# Altium PCB 高考倒计时.PcbDoc
Units mil, origin at the board's own origin, x right, y up, seen from the top; angles counter-clockwise.
Board outline 3500 x 2635 mil, 2 copper layers (Top Layer, Bottom Layer); 80 components, 65 nets, 247 pads, 256 vias.
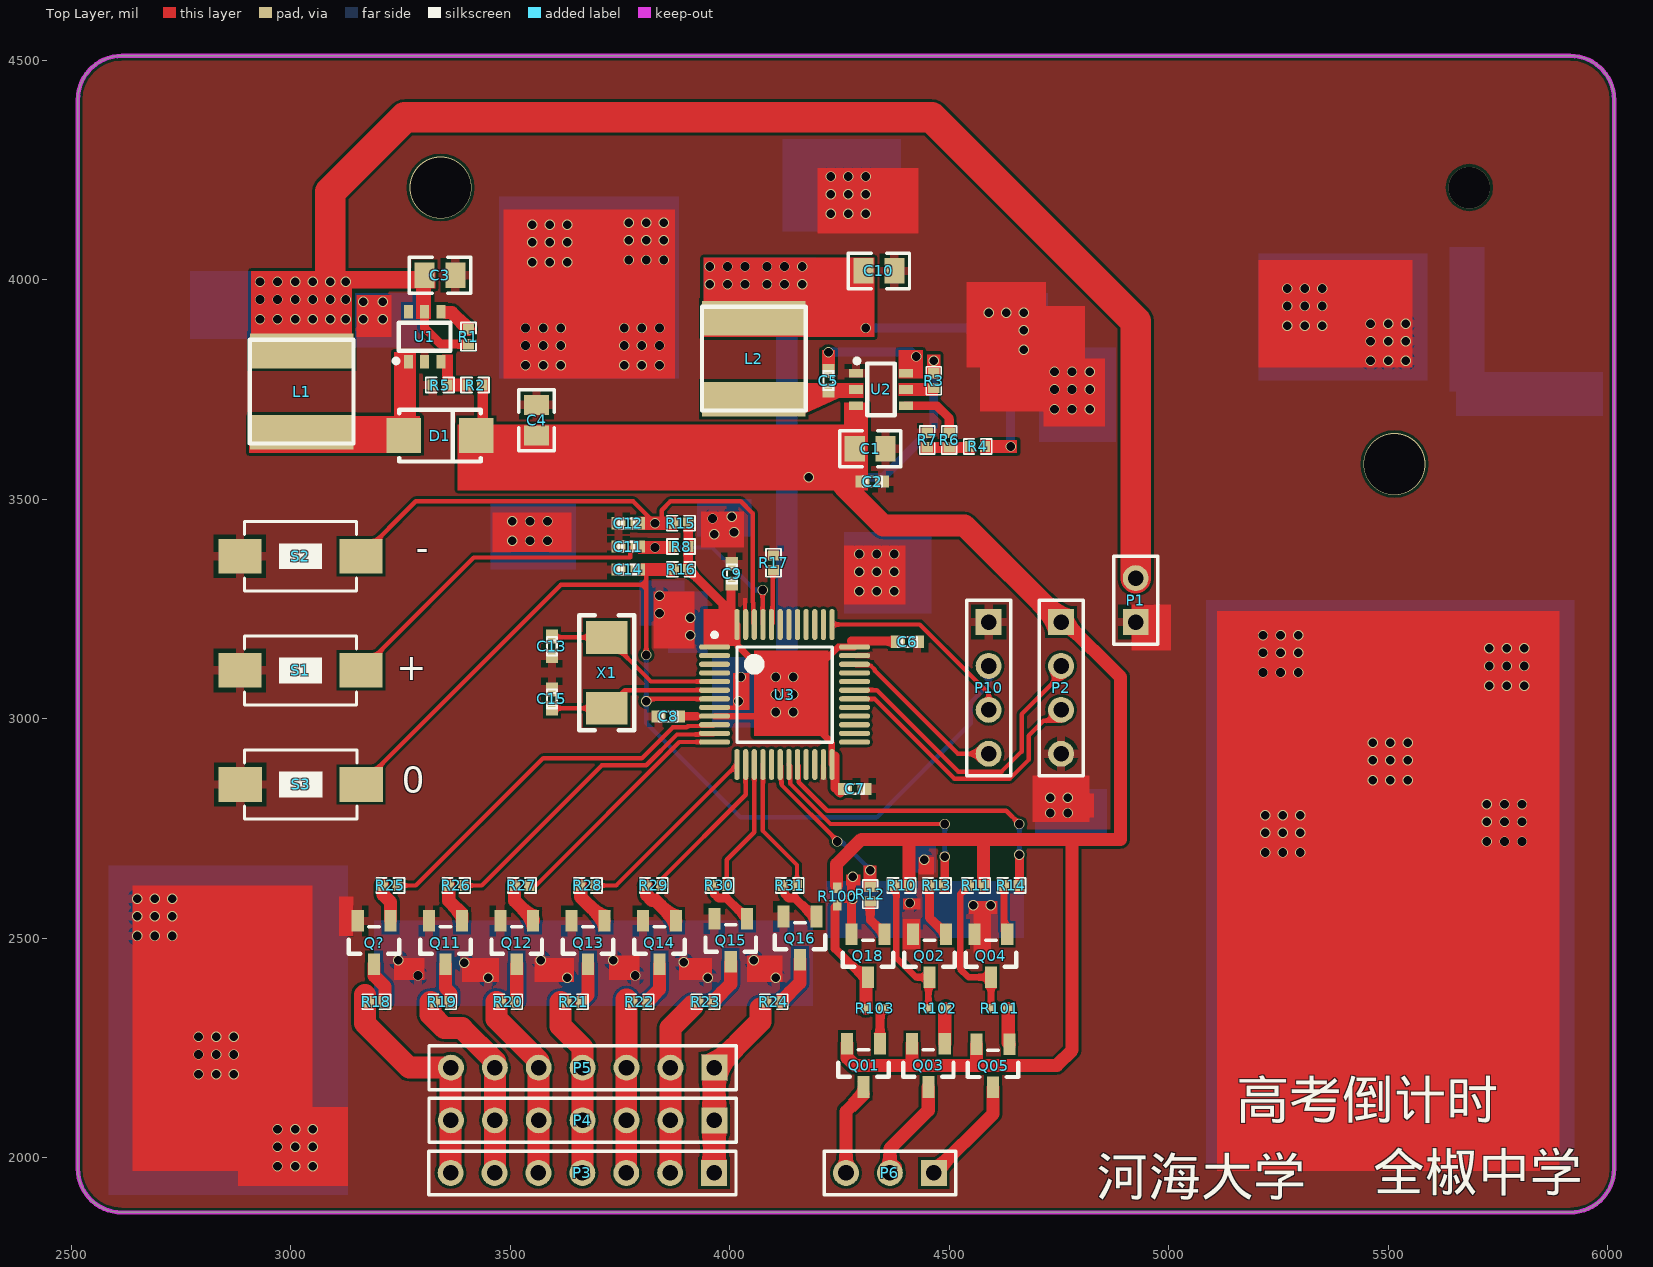
[diagram p0: Top Layer view]
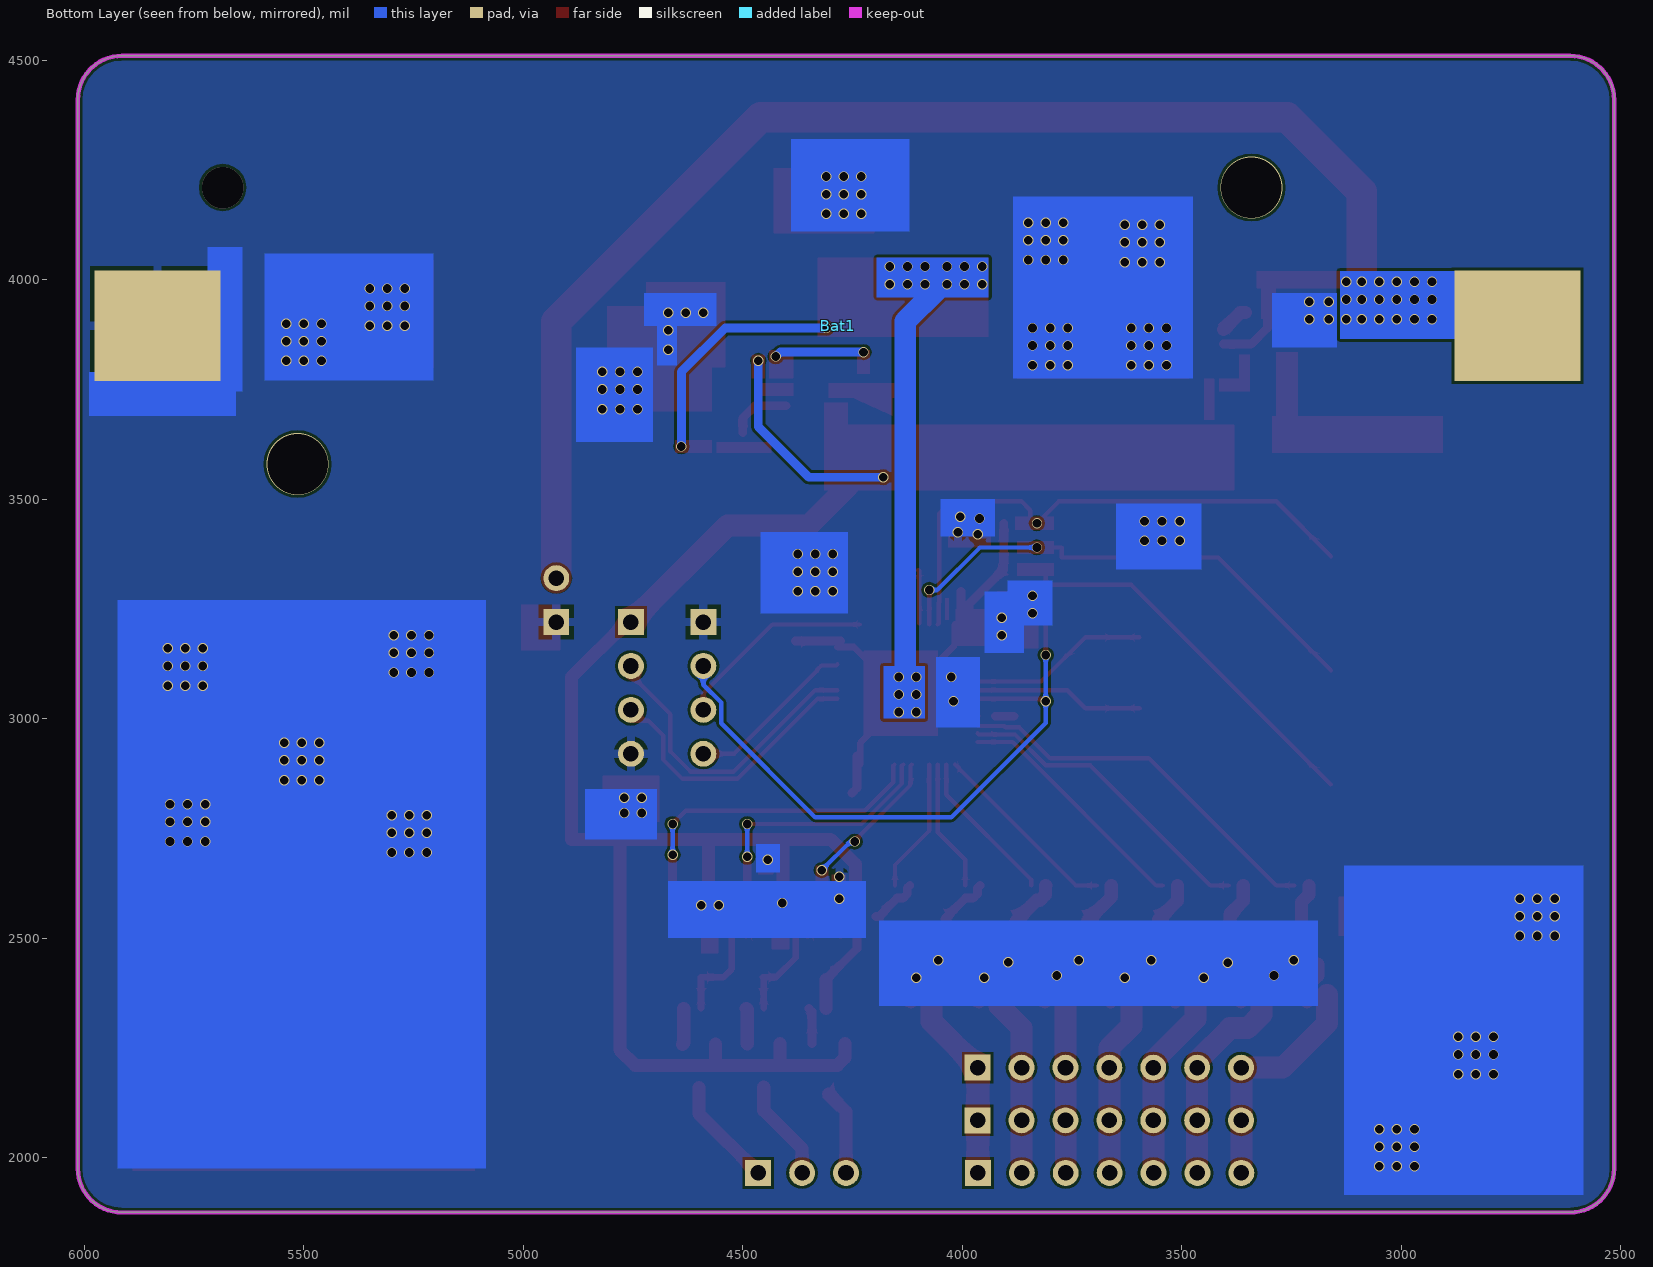
[diagram p1: Bottom Layer view, seen from below]

## Layer stack, top to bottom
Top Solder: solder mask 0.4, Solder Resist, Dk 3.5
Top Layer: signal copper 1.4
Dielectric 1: dielectric 12.6, FR-4, Dk 4.8
Bottom Layer: signal copper 1.4
Bottom Solder: solder mask 0.4, Solder Resist, Dk 3.5

## Board outline
2515,1975 ccw(c2615,1975) 2615,1875 5915,1875 ccw(c5915,1975) 6015,1975 6015,4410 ccw(c5915,4410) 5915,4510 2615,4510 ccw(c2615,4410) 2515,4410

## Design rules (kind name [scope] priority, off if disabled: settings)
Clearance [All] p1: gap=6
PolygonConnect [All] p1: connectstyle=Relief reliefconductorwidth=20 reliefentries=4 polygonreliefangle="90 Angle" airgapwidth=10
RoutingVias [All] p1: holewidth=28 width=50 viastyle="Through Hole" minholewidth=28 minwidth=50 maxholewidth=28 maxwidth=50
SolderMaskExpansion [All] p1: expansion=4
Width [All] p1: maxlimit=10000 minlimit=6 preferedwidth=10
30 further rules are at their usual default settings.

## Components (designator, comment, footprint, x,y, rotation, side; value= is the part's Value field where it differs from the comment)
Bat1 "18650" 18650 2735,3895 r0 bottom
C1 "22uF" 0805 4320,3615 r180 top
C2 "104" 0402-CAP 4325,3540 r0 top
C3 "22uF" 0805 3340,4010 r180 top
C4 "22uF" 0805 3560,3680 r270 top
C5 "104" 0402-CAP 4225,3770 r270 top
C6 "104" 0402-CAP 4405,3175 r0 top
C7 "104" 0402-CAP 4285,2840 r0 top
C8 "104" 0402-CAP 3860,3005 r180 top
C9 "104" 0402-CAP 4005,3330 r90 top
C10 "22uF" 0805 4340,4020 r180 top
C11 "104" 0402-CAP 3768.7,3392 r180 top
C12 "104" 0402-CAP 3768.7,3445 r180 top
C13 "22pf" 0402-CAP 3595,3165 r270 top
C14 "104" 0402-CAP 3768.7,3340 r180 top
C15 "22pf" 0402-CAP 3595,3045 r90 top
D1 "SS54" DIOM4225X24N 3335,3640 r180 top
L1 "6.8uH" L-SMD-6.0X6.0X4.7 3025,3745 r270 top
L2 "6.8uH" L-SMD-6.0X6.0X4.7 4055,3820 r90 top
P1 "充电输入" HDR1X2 4925,3220 r90 top
P2 "Header 4" HDR1X4 4755,3220 r270 top
P3 "Header 7" HDR1X7 3964.41,1965 r180 top
P4 "Header 7" HDR1X7 3965,2085 r180 top
P5 "Header 7" HDR1X7 3965,2205 r180 top
P6 "Header 3" HDR1X3 4465,1965 r180 top
P10 "Header 4" HDR1X4 4590,3220 r270 top
Q01 "S8550" SOT-23(SOT-23-3) 4305,2210 r180 top
Q02 "S8050" SOT-23(SOT-23-3) 4455,2460 r180 top
Q03 "S8550" SOT-23(SOT-23-3) 4452.5,2210 r180 top
Q04 "S8050" SOT-23(SOT-23-3) 4595,2460 r180 top
Q05 "S8550" SOT-23(SOT-23-3) 4600,2209.2 r180 top
Q11 "S8050" SOT-23(SOT-23-3) 3352.5,2490 r180 top
Q12 "S8050" SOT-23(SOT-23-3) 3515,2490 r180 top
Q13 "S8050" SOT-23(SOT-23-3) 3677.5,2490 r180 top
Q14 "S8050" SOT-23(SOT-23-3) 3840,2490 r180 top
Q15 "S8050" SOT-23(SOT-23-3) 4002.5,2495 r180 top
Q16 "S8050" SOT-23(SOT-23-3) 4160,2500 r180 top
Q18 "S8050" SOT-23(SOT-23-3) 4315,2460 r180 top
Q? "S8050" SOT-23(SOT-23-3) 3190,2490 r180 top
R1 "10K" 0402#1 3405,3870 r270 top
R2 "38.3K" 0402#1 3420,3760 r0 top
R3 "100K" 0402#1 4465,3770 r90 top
R4 "40.2K" 0402#1 4565,3620 r180 top
R5 "1.5K" 0402#1 3340,3760 r0 top
R6 "10K" 0402#1 4500,3635 r90 top
R7 "13K" 0402#1 4450,3635 r90 top
R8 "10K" 0402#1 3889.3,3392 r0 top
R10 "1K" 0402#1 4391.7,2620 r0 top
R11 "1K" 0402#1 4561.7,2620 r0 top
R12 "1K" 0402#1 4320,2600 r270 top
R13 "1K" 0402#1 4471.7,2620 r180 top
R14 "1K" 0402#1 4641.7,2620 r180 top
R15 "10K" 0402#1 3888.7,3445 r180 top
R16 "10K" 0402#1 3889.3,3340 r0 top
R17 "10K" 0402#1 4100,3355 r270 top
R18 "490" 0402#1 3195,2355 r180 top
R19 "490" 0402#1 3345,2355 r180 top
R20 "490" 0402#1 3495,2355 r180 top
R21 "490" 0402#1 3645,2355 r180 top
R22 "490" 0402#1 3795,2355 r180 top
R23 "490" 0402#1 3945,2355 r180 top
R24 "490" 0402#1 4100,2355 r180 top
R25 "1K" 0402#1 3226.7,2620 r180 top
R26 "1K" 0402#1 3376.7,2620 r180 top
R27 "1K" 0402#1 3526.7,2620 r180 top
R28 "1K" 0402#1 3676.7,2620 r180 top
R29 "1K" 0402#1 3826.7,2620 r180 top
R30 "1K" 0402#1 3976.7,2620 r180 top
R31 "1K" 0402#1 4136.7,2620 r180 top
R100 "1K" 0402#2 4245,2595 r90 top
R101 "1K" 0402#2 4615,2340 r0 top
R102 "1K" 0402#2 4472.5,2340 r180 top
R103 "1K" 0402#2 4330,2340 r180 top
S1 "Switch" Switch_Liu 3020,3110 r0 top
S2 "Switch" Switch_Liu 3020,3370 r0 top
S3 "Switch" Switch_Liu 3025,2850 r180 top
U1 "SX1308" SOT-23-6 3305,3870 r0 top
U2 "BL8032CB6TR" SOT-23-6 4345,3750 r270 top
U3 "STM32F103C8T6" STM-LQFP48_N 4125,3055 r0 top
X1 "X503212MSD2GC" OSC-YSX-5032_2P 3720,3104.41 r0 top

## Footprints (in the part's own frame and the unit in brackets; to place one, negate y for a bottom-side part, rotate by r counter-clockwise, add the part's x,y. Pads: shape width x height; smd on the part's side, far side on the other; paste and mask are expansions set on the pad)
0402#1 [mm]
  rect 0.6x0.65 smd: 1(-0.424,0) 2(0.424,0)
  silkscreen extent -0.82,-0.43 0.81,0.43
0402#2 [mm] "Chip Capacitor, Body 1.0x0.5mm, IPC High Density"
  rect 0.6x0.5 smd: 1(-0.5,0) 2(0.5,0)
  body extent -0.55,-0.3 0.55,0.3, height 1.3
0402-CAP [mil]
  rect 32x27.9 smd: 1(21.9,0) 2(-21.9,0)
  silkscreen extent -21,-11 21,11
0805 [mm]
  rect 1.16x1.47 smd: 1(-0.89,0) 2(0.89,0)
  silkscreen extent -1.77,-1.04 1.77,1.03, body extent -1,-0.62 1,0.63, height 0.49
18650 [mm]
  rect 7.3x6.4 smd: 1(0,0) 2(78.7,0)
DIOM4225X24N [mm] "Molded Diode, 2-Leads, Body 4.25x2.49mm, IPC Medium Density"
  rect 2x2 smd: 1(1.973,-0.127) 2(-2.227,-0.127)
  silkscreen extent -2.48,-1.63 2.22,1.37
HDR1X2 [mm] "Connector; Header; 2 Position"
  rect 1.5x1.5 hole 0.9: 1(0,0)
  round 1.5 hole 0.9: 2(2.54,0)
  silkscreen extent -1.27,-1.27 3.81,1.27
HDR1X3 [mm] "Connector; Header; 3 Position"
  rect 1.5x1.5 hole 0.9: 1(0,0)
  round 1.5 hole 0.9: 2(2.54,0) 3(5.08,0)
  silkscreen extent -1.27,-1.27 6.35,1.27
HDR1X4 [mm] "Connector; Header; 4 Position"
  rect 1.5x1.5 hole 0.9: 1(0,0)
  round 1.5 hole 0.9: 2(2.54,0) 3(5.08,0) 4(7.62,0)
  silkscreen extent -1.27,-1.27 8.89,1.27
HDR1X7 [mm] "Connector; Header; 7 Position"
  rect 1.5x1.5 hole 0.9: 1(0,0)
  round 1.5 hole 0.9: 2(2.54,0) 3(5.08,0) 4(7.62,0) 5(10.16,0) 6(12.7,0) 7(15.24,0)
  silkscreen extent -1.27,-1.27 16.51,1.27
L-SMD-6.0X6.0X4.7 [mm]
  rect 2x6 smd: 1(-2.35,0) 2(2.35,0)
  silkscreen extent -3,-3 3,3
OSC-YSX-5032_2P [mm]
  rect 2.4x1.9 smd: 1(0,2.05) 2(0,-2.05)
  silkscreen extent -1.6,-3.33 1.6,3.32
SOT-23(SOT-23-3) [mm]
  rect 0.7x1.25 smd: 1(-0.95,-1.25) 2(0.95,-1.25) 3(0,1.25)
  silkscreen extent -1.46,-0.9 1.46,0.65
SOT-23-6 [mil]
  rect 20.1x31.5 smd: 1(-37,-57) 2(0,-57) 3(37,-57) 4(37,57) 5(0,57) 6(-37,57)
  silkscreen extent -70,-60 59,31
STM-LQFP48_N [mm] "QFP, 48-Leads, Body 7x7mm, Pitch 0.5mm, IPC Medium Density"
  oval 1.8x0.3 smd: 1(-4.05,2.75) 2(-4.05,2.25) 3(-4.05,1.75) 4(-4.05,1.25) 5(-4.05,0.75) 6(-4.05,0.25) 7(-4.05,-0.25) 8(-4.05,-0.75) 9(-4.05,-1.25) 10(-4.05,-1.75) 11(-4.05,-2.25) 12(-4.05,-2.75) 25(4.05,-2.75) 26(4.05,-2.25) 27(4.05,-1.75) 28(4.05,-1.25) 29(4.05,-0.75) 30(4.05,-0.25) 31(4.05,0.25) 32(4.05,0.75) 33(4.05,1.25) 34(4.05,1.75) 35(4.05,2.25) 36(4.05,2.75)
  oval 0.3x1.8 smd: 13(-2.75,-4.05) 14(-2.25,-4.05) 15(-1.75,-4.05) 16(-1.25,-4.05) 17(-0.75,-4.05) 18(-0.25,-4.05) 19(0.25,-4.05) 20(0.75,-4.05) 21(1.25,-4.05) 22(1.75,-4.05) 23(2.25,-4.05) 24(2.75,-4.05) 37(2.75,4.05) 38(2.25,4.05) 39(1.75,4.05) 40(1.25,4.05) 41(0.75,4.05) 42(0.25,4.05) 43(-0.25,4.05) 44(-0.75,4.05) 45(-1.25,4.05) 46(-1.75,4.05) 47(-2.25,4.05) 48(-2.75,4.05)
  silkscreen extent -4.17,-2.75 2.75,3.57, body extent -3.5,-3.5 3.5,3.5, height 1.6
Switch_Liu [mm]
  rect 2.5x2 smd: 1(3.556,0) 2(-3.444,0)
  silkscreen extent -3.19,-2 3.31,2, body extent -3.17,-2.03 3.3,2.03, height 1.2

## Part data
C1 C3 C4 C10: library part 1uF
C2 C5 C6 C7 C8 C9 C11 C12 C13 C14 C15: library part 0.1UF-16V(+-10%)(0402)
P1: library part "Header 2", "Header, 2-Pin"
P2 P10: "Header, 4-Pin"
P3 P4 P5: "Header, 7-Pin"
P6: "Header, 3-Pin"
R1 R2 R3 R4 R5 R6 R7 R8 R15 R16 R17 R18 R19 R20 R21 R22 R23 R24: library part 1K
U3: "ARM Cortex-M3 32-bit MCU, 64 KB Flash, 20 KB Internal RAM, 37 I/Os, 48-pin LQFP, -40 to 85 degC, Tray"

## Via types
v1: diameter 23.62, hole 19.68, Top Layer to Bottom Layer, 253 vias
v2: diameter 141.73, hole 137.8, Top Layer to Bottom Layer, 2 vias
v3: diameter 94.49, hole 94.49, Top Layer to Bottom Layer, 1 vias

## Nets (pads, with @x,y where several pads share a name; then routed paths per layer and width w, separated by ;. In a path a pad name is that pad's centre, name@x,y a point inside that pad or via, vN(x,y) a via of type N, cw(c..) or ccw(c..) an arc to the next point about the centre after c; other vN are vias at no path point)
3V3: C6.2 C7.2 C8.2 C9.2 C10.2 L2.2 R4.1 R8.2 R15.1 R16.2 U3.1 U3.9 U3.24 U3.36 U3.48 | length 2827.2
  Top Layer w15: U3.9 4171.52,3005.79 ; U3.48 4017.01,3214.17 4017.01,3167.99 4075,3110 4175,3110 ; U3.24 4232.99,2895.83 4232.99,2944.32 4171.52,3005.79 ; U3.36 4247.16,3163.27 4193.9,3110 4175,3110 ; 4171.52,3005.79 4171.52,3106.52 4175,3110
  Top Layer w20: C8.2@3881.9,3005.53 3925,3005.53 ; R15.1 3905.4,3340.6 R16.2 3985,3261 3985,3235 ; 4003.1,3206.9 4003.1,3290 ; 4240,2915 4240,2841.9 C7.2@4251.9,2830 ; 4276.9,3176.9 C6.2@4380,3176.9
  Bottom Layer w20: v1(4310,3890) 4540,3890 4640,3790 v1(4640,3620)
  Bottom Layer w50: 4055,3980 4130,3905 4130,3095
  other v1: 4105,3015 4145,3015 4105,3055 4145,3055 4105,3095 4145,3095 3955,3990 3995,3990 4035,3990 4085,3990 4125,3990 4165,3990 3955,4030 3995,4030 4035,4030 4085,4030 4125,4030 4165,4030
16V: C1.2 C2.2 C4.2 D1.2 P2.1 Q01.2 Q03.2 Q05.2 R2.2 R3.2 R10.2 R11.2 R100.2 U2.3 | length 3737.8
  Top Layer w30: R100.2@4243.4,2620 4243.4,2668.4 4300,2725 4408.4,2725 ; Q01.2 4267.6,2227.4 4285,2210 4420,2210 ; R10.2 4408.4,2725 ; Q03.2 4415.1,2214.9 4420,2210 ; Q05.2 4562.6,2212.4 4565,2210 ; R11.2 4578.4,2725 ; P2.1 4765,3220 4890,3095 4890,2725 4780,2725 ; 4408.4,2725 4578.4,2725 ; 4420,2210 4565,2210 ; 4565,2210 4745,2210 4780,2245 4780,2725 ; 4578.4,2725 4780,2725
  Top Layer w50: 4260,3530 4350,3440 4535,3440 P2.1
  Bottom Layer w20: v1(4180,3550) 4350,3550 4465,3665 v1(4465,3815)
A0: R25.1 U3.10 | length 869.9
  Top Layer w10: R25.1 3285,2620 3575,2910 3800,2910 3870.05,2980.05 3902.46,2980.05 3904.8,2982.39 3904.97,2982.39 3905.54,2982.96 3906.86,2982.96 3907.22,2983.32 U3.10@3962.77,2983.32
A1: R26.1 U3.11 | length 715.6
  Top Layer w10: R26.1 3435,2620 3709,2894 3810,2894 3880,2964 3963.13,2964 U3.11
A2: R27.1 U3.12 | length 557.5
  Top Layer w10: R27.1 3558.63,2620 3885.36,2946.73 U3.12
A3: R28.1 U3.13 | length 437.5
  Top Layer w10: R28.1 3741.18,2620 U3.13
A4: R29.1 U3.14 | length 355.5
  Top Layer w10: R29.1 3843.4,2633.4 4036.42,2826.42 U3.14
A5: R30.1 U3.15 | length 301.5
  Top Layer w10: R30.1 3993.4,2678.4 4056.1,2741.1 U3.15
A6: R31.1 U3.16 | length 307.7
  Top Layer w10: U3.16 4075.79,2744.21 4153.4,2666.6 R31.1
B0: R12.1 U3.18 | length 336.3
  Top Layer w10: U3.18 4117.94,2892.77 4117.94,2849.12 v1@4250,2717.06
  Bottom Layer w10: v1(4245,2720) 4255,2720 v1(4320,2655)
B1: R13.1 U3.19 | length 510.2
  Top Layer w10: U3.19 4137.62,2892.77 4137.62,2852.06 4229.68,2760 v1(4490,2760)
  Bottom Layer w10: v1(4490,2685) v1(4490,2760)
B2: R14.1 U3.20 | length 653.7
  Top Layer w10: U3.20 4157.31,2892.77 4157.31,2855 4222.31,2790 4630,2790 v1(4660,2760)
  Bottom Layer w10: v1(4660,2690) v1(4660,2760)
GND: Bat1.2 C1.1 C2.1 C3.1 C4.1 C6.1 C7.1 C8.1 C9.1 C10.1 C11.1 C12.1 C13.1 C14.1 C15.1 P1.1 P2.4 P10.1 Q02.2 Q04.2 Q11.2 Q12.2 Q13.2 Q14.2 Q15.2 Q16.2 Q18.2 Q?.2 R5.1 R7.2 R17.1 S1.2 S2.2 S3.1 U1.2 U2.1 U3.8 U3.23 U3.35 U3.47 | length 131.8
  Top Layer w20: Q18.2 4277.6,2637.6 v1(4280,2640)
  other v1: 2970,1980 3010,1980 3050,1980 2970,2025 3010,2025 3050,2025 2970,2065 3010,2065 3050,2065 2790,2190 2830,2190 2870,2190 2790,2235 2830,2235 2870,2235 2790,2275 2830,2275 2870,2275 3450,2410 3630,2410 3950,2410 4105,2410 3290,2415 3785,2415 3395.22,2444.05 3895,2445 3245,2450 3570,2450 3735,2450 4055,2450 2650,2505 2690,2505 2730,2505 2650,2550 2690,2550 2730,2550 4555,2575 4595,2575 4410,2580 2650,2590 2690,2590 2730,2590 4280,2590 4443.51,2678.8 5220,2695 5260,2695 5300,2695 5725,2720 5765,2720 5805,2720 5220,2740 5260,2740 5300,2740 5725,2765 5765,2765 5805,2765 5220,2780 5260,2780 5300,2780 4730,2785 4770,2785 5725,2805 5765,2805 5805,2805 4730,2820 4770,2820 5465,2860 5505,2860 5545,2860 5465,2905 5505,2905 5545,2905 5465,2945 5505,2945 5545,2945 4020,3040 5730,3075 5770,3075 5810,3075 4025,3095 5215,3105 5255,3105 5295,3105 5730,3120 5770,3120 5810,3120 5215,3150 5255,3150 5295,3150 5730,3160 5770,3160 5810,3160 3910,3190 5215,3190 5255,3190 5295,3190 3910,3230 3840,3240 3840,3280 4295,3290 4335,3290 4375,3290 4295,3335 4335,3335 4375,3335 4295,3375 4335,3375 4375,3375 3505,3405 3545,3405 3585,3405 3965,3420 4010,3425 3505,3450 3545,3450 3585,3450 3960.97,3455.9 4005,3460 4740,3705 4780,3705 4820,3705 4740,3750 4780,3750 4820,3750 4740,3790 4780,3790 4820,3790 3535,3805 3575,3805 3615,3805 3760,3805 3800,3805 3840,3805 5460,3815 5500,3815 5540,3815 4670,3840 3535,3850 3575,3850 3615,3850 3760,3850 3800,3850 3840,3850 5460,3860 5500,3860 5540,3860 4670,3885 3535,3890 3575,3890 3615,3890 3760,3890 3800,3890 3840,3890 5270,3895 5310,3895 5350,3895 5460,3900 5500,3900 5540,3900 3165,3910 3210,3910 4590,3925 4630,3925 4670,3925 5270,3940 5310,3940 5350,3940 3165,3950 3210,3950 5270,3980 5310,3980 5350,3980 3550,4040 3590,4040 3630,4040 3770,4045 3810,4045 3850,4045 3550,4085 3590,4085 3630,4085 3770,4090 3810,4090 3850,4090 3550,4125 3590,4125 3630,4125 3770,4130 3810,4130 3850,4130 4230,4150 4270,4150 4310,4150 4230,4195 4270,4195 4310,4195 4230,4235 4270,4235 4310,4235
NetC5_1: C5.1 L2.1 U2.2
NetC5_2: C5.2 U2.6 | length 204.1
  Bottom Layer w20: v1(4225,3835) 4415,3835 v1(4425,3825)
NetC11_2: C11.2 R8.1 S1.1 U3.45 | length 1162.5
  Top Layer w10: S1.1 3417.05,3367.05 3773.8,3367.05 3773.8,3390 v1(3830,3390) ; U3.45@4075,3215.24 v1(4075,3293.16)
  Bottom Layer w10: v1(3830,3390) 3960,3390 4056.84,3293.16 v1(4075,3293.16)
NetC12_2: C12.2 R15.2 S2.1 U3.46 | length 1249.2
  Top Layer w10: S2.1 3285,3495 3780,3495 v1(3830,3445) ; 3845,3450 3845,3475 3865,3495 4025,3495 4052.19,3467.81 4052.19,3265.55 4053.32,3264.42 4053.32,3217.23 U3.46
NetC13_2: C13.2 U3.5 X1.1 | length 410.4
  Top Layer w10: C13.2@3596.78,3185.12 X1.1 3820.59,3084.53 U3.5
NetC15_2: C15.2 U3.6 X1.2 | length 387
  Top Layer w10: C15.2@3595.6,3023.7 X1.2 3761.14,3064.84 U3.6
NetD1_1: D1.1 L1.2 U1.1
NetP3_1: P3.1 P4.1 P5.1 R24.2 | length 417.9
  Top Layer w50: P3.1 P5.1@3964.41,2204.41 ; P5.1 4070,2310 4070,2340
NetP3_2: P3.2 P4.2 P5.2 R23.2 | length 400.1
  Top Layer w50: P3.2@3865,1965.59 P4.2 P5.2 3865,2295 3915,2345
NetP3_3: P3.3 P4.3 P5.3 R22.2 | length 394.4
  Top Layer w50: P3.3 P5.3@3764.41,2204.41 ; P5.3 3765,2360
NetP3_4: P3.4 P4.4 P5.4 R21.2 | length 410.1
  Top Layer w50: 3615,2355 3615,2300 3665,2250 P5.4 P4.4 P3.4@3665,1965.59
NetP3_5: P3.5 P4.5 P5.5 R20.2 | length 429.2
  Top Layer w50: R20.2@3468.89,2355 3468.89,2316.11 3565,2220 P5.5 ; P3.5 P5.5@3564.41,2204.41
NetP3_6: P3.6 P4.6 P5.6 R19.2 | length 473.4
  Top Layer w50: R19.2@3318.89,2355 3318.89,2326.11 3350,2295 3390,2295 3465,2220 P5.6 P4.6 P3.6@3465,1965.59
NetP3_7: P3.7 P4.7 P5.7 R18.2 | length 541.3
  Top Layer w50: 3168.89,2370 3168.89,2306.11 3270,2205 P5.7 ; P3.7 P5.7@3364.41,2204.41
NetP6_1: P6.1 Q05.3 | length 250.9
  Top Layer w30: P6.1 4600,2100 Q05.3
NetP6_2: P6.2 Q03.3 | length 250.4
  Top Layer w30: P6.2@4378,1978 P6.2 4365,2020 4452.5,2107.5 Q03.3
NetP6_3: P6.3 Q01.3 | length 196.6
  Top Layer w30: P6.3 4265,2105 Q01.3@4305,2145
NetQ01_1: Q01.1 R103.1 | length 83.8
  Top Layer w20: Q01.1 4342.4,2332.72 R103.1
NetQ02_1: Q02.1 R13.2 | length 126.3
  Top Layer w20: R13.2 4455,2546.6 Q02.1
NetQ02_3: Q02.3 R10.1 R102.2 | length 332.1
  Top Layer w15: R10.1 4379.68,2615.32 4379.68,2455.32 4424.2,2410.8 Q02.3 4452.81,2408.61 R102.2
NetQ03_1: Q03.1 R102.1 | length 81.7
  Top Layer w30: Q03.1 4489.9,2337.72 R102.1
NetQ04_1: Q04.1 R14.2 | length 113.9
  Top Layer w15: R14.2 4625,2516.6 Q04.1
NetQ04_3: Q04.3 R11.1 R101.1 | length 347.2
  Top Layer w15: R11.1 4525,2600 4525,2430 4544.2,2410.8 Q04.3 4595.31,2410.49 R101.1
NetQ05_1: Q05.1 R101.2 | length 82.7
  Top Layer w30: R101.2 4634.69,2261.11 Q05.1
NetQ11_1: Q11.1 R26.2 | length 93.2
  Top Layer w30: R26.2 3360,2585 3389.9,2555.1 Q11.1
NetQ11_3: Q11.3 R19.1 | length 90.9
  Top Layer w30: Q11.3 3352.5,2386.44 3364.89,2374.05 R19.1@3364.89,2355
NetQ12_1: Q12.1 R27.2 | length 98.4
  Top Layer w30: R27.2 3510,2585 3552.4,2542.6 Q12.1
NetQ12_3: Q12.3 R20.1 | length 85.8
  Top Layer w30: R20.1@3514.89,2355 3514.89,2440.69 Q12.3
NetQ13_1: Q13.1 R28.2 | length 103.5
  Top Layer w30: R28.2 3660.59,2619.41 3660.59,2593.51 Q13.1
NetQ13_3: Q13.3 R21.1 | length 92.3
  Top Layer w30: R21.1 3677.5,2370.8 Q13.3
NetQ14_1: Q14.1 R29.2 | length 113.1
  Top Layer w30: R29.2 3810.59,2619.41 3810.59,2598.51 3822.89,2586.2 3830.39,2586.2 Q14.1
NetQ14_3: Q14.3 R22.1 | length 97.5
  Top Layer w30: R22.1 3840,2383.3 Q14.3
NetQ15_1: Q15.1 R30.2 | length 119.4
  Top Layer w20: R30.2 3965.59,2614.41 3965.59,2600.58 3974.96,2591.2 3992.89,2591.2 Q15.1
NetQ15_3: Q15.3 R23.1 | length 107.7
  Top Layer w30: R23.1 4002.5,2395.8 Q15.3
NetQ16_1: Q16.1 R31.2 | length 114.8
  Top Layer w20: R31.2 4125.59,2614.41 4125.59,2600.58 4134.96,2591.2 4148.8,2591.2 4190.8,2549.2 Q16.1
NetQ16_3: Q16.3 R24.1 | length 113.7
  Top Layer w30: R24.1 4160,2398.3 Q16.3
NetQ18_1: Q18.1 R12.2 | length 87.5
  Top Layer w20: R12.2 4320,2541.6 Q18.1
NetQ18_3: Q18.3 R100.1 R103.2 | length 266.5
  Top Layer w20: R100.1 4240,2570.32 4240,2476.43 Q18.3@4310.31,2406.11
  Top Layer w30: R103.2 Q18.3@4310.31,2406.11
NetQ?_1: Q?.1 R25.2 | length 88
  Top Layer w30: R25.2 3210.59,2619.41 3210.59,2598.51 3227.4,2581.7 Q?.1
NetQ?_3: Q?.3 R18.1 | length 96.1
  Top Layer w30: Q?.3 3190,2413.94 3214.89,2389.05 R18.1@3214.89,2355
NetR1_1: R1.1 U1.4 | length 65.9
  Top Layer w30: 3355,3925 3366.7,3925 R1.1
NetR2_1: R2.1 R5.2 U1.3
NetR3_1: R3.1 U2.5
NetR4_2: R4.2 R6.1 R7.1
NetR6_2: R6.2 U2.4 | length 142.9
  Top Layer w20: U2.4 4472,3713 4500,3685 R6.2
NetR17_2: R17.2 U3.44 | length 121.8
  Top Layer w10: U3.44@4098.25,3217.23 4098.25,3336.55 R17.2
RST: C14.2 P10.2 R16.1 S3.2 U3.7 | length 2400.2
  Top Layer w10: S3.2 3615.59,3305 3810,3305 ; v1(3810,3040) 3815.16,3045.16 U3.7 ; v1(3810,3145) 3810,3305 ; 3810,3330 3810,3305
  Bottom Layer w10: v1(3810,3145) v1(3810,3040) 3810,2990 4025,2775 4335,2775 4549.47,2989.47 4549.47,3036.79 4590,3077.31 P10.2
RX: P2.2 U3.31 | length 708.6
  Top Layer w10: U3.31 4284.61,3065 4335,3065 4520.53,2879.47 4619.47,2879.47 4665,2925 4665,3010 4755,3100 P2.2
SWCLK: P10.3 U3.37 | length 459.2
  Top Layer w10: U3.37 4432.96,3214.45 4590,3057.41 P10.3
SWDIO: P10.4 U3.34 | length 391.2
  Top Layer w10: U3.34 4287.23,3121.12 4320.98,3121.12 4330.88,3111.22 4330.88,3109.12 4520,2920 P10.4
TX: P2.3 U3.30 | length 657.5
  Top Layer w10: U3.30 4329.84,3045.16 4511.53,2863.47 4638.47,2863.47 4681,2906 4681,2961 4715,2995 4755,2995 P2.3
VBAT: Bat1.1 C3.2 L1.1 P1.2 R1.2 U1.5 | length 3040.2
  Top Layer w20: U1.5 3305,3890 3341.7,3853.3 R1.2
  Top Layer w70: v1(3090,3995) 3090,4200 3260,4370 4460,4370 4925,3905 P1.2
  other v1: 2930,3910 2970,3910 3010,3910 3050,3910 3090,3910 3125,3910 2930,3955 2970,3955 3010,3955 3050,3955 3090,3955 3125,3955 2930,3995 2970,3995 3010,3995 3050,3995 3125,3995
pads on no net: U1.6 U3.2 U3.3 U3.4 U3.17 U3.21 U3.22 U3.25 U3.26 U3.27 U3.28 U3.29 U3.32 U3.33 U3.38 U3.39 U3.40 U3.41 U3.42 U3.43
copper on no net:
  other v2: 5514.53,3580.04 3341.3,4209.96
  other v3: 5685,4209.96

## Polygon pours and split planes (outlines as drawn)
GND on Top Layer "GND_L01_P006" (solid, remove dead copper, pour order 6): 2500,4500 6065,4500 6065,1870 2500,1870
GND on Bottom Layer "GND_L02_P008" (solid, remove dead copper, pour order 8): 2525,4500 6010,4500 6005,4495 6005,1885 2530,1885 2525,1880

## Keep-outs
Keep-Out Layer:
  the board outline again, w10

## Other copper
Top Layer:
  rectangle net NetD1_1: 2905,3605 3295,3690
  rectangle net 16V: 3380,3605 3590,3670
  rectangle net VBAT: 2910,3870 3140,4020
  rectangle net VBAT: 3125,3980 3330,4020
  rectangle net VBAT: 3285,3910 3320,4005
  rectangle net NetD1_1: 3235,3670 3285,3835
  rectangle net NetR2_1: 3345,3745 3370,3830
  rectangle net NetR2_1: 3345,3745 3415,3775
  rectangle net 16V: 3425,3680 3450,3775
  rectangle net NetC5_1: 4155,3730 4305,3765
  rectangle net 3V3: 3940,3870 4330,4050
  rectangle net NetR4_2: 4435,3605 4560,3630
  rectangle net NetR3_1: 4385,3735 4475,3765
  rectangle net 16V: 4260,3580 4315,3720
  rectangle net NetC5_2: 4210,3785 4240,3840
  rectangle net 3V3: 4570,3605 4655,3635
  rectangle net NetC5_2: 4385,3775 4440,3840
  rectangle net 16V: 4450,3775 4480,3830
  rectangle net 16V: 4260,3545 4315,3590
  rectangle net 16V: 3525,3520 4315,3670
  rectangle net 16V: 3380,3545 3565,3605
  rectangle net 16V: 3380,3520 3535,3545
  rectangle net 3V3: 3940,3165 4015,3250
  rectangle net 3V3: 4055,2960 4225,3155
  rectangle net NetC12_2: 3790.6,3430 3880,3460
  rectangle net NetC11_2: 3790.6,3375 3875,3405
  rectangle net RST: 3790.6,3325 3875,3355
  rectangle net B1: 4480,2605 4500,2695
  rectangle net B2: 4650,2605 4670,2690
  rectangle net GND: 4007.22,3020 4045,3104.21
  rectangle net GND: 3935,3390 4032.64,3471.49
  rectangle net GND: 4030.21,3225 4040,3275
  rectangle net GND: 5110,1970 5890,3245
  rectangle net GND: 4915,3155 5005,3259.53
  rectangle net GND: 4260,3260 4400,3394.55
  rectangle net GND: 4570,3700 4810,3940
  rectangle net GND: 5205,3800 5555,4045
  rectangle net GND: 3485,3775 3875,4160
  rectangle net GND: 4200,4105 4430,4255
  rectangle net GND: 2640,1970 3050,2620
  rectangle net GND: 3460,3380 3640,3470
  rectangle net GND: 4540,3800 4720.45,3995
  rectangle net GND: 4715,3665 4855,3820
  rectangle net GND: 3990,3020 4020,3030
  rectangle net GND: 2880,1935 3130,2115
  rectangle net GND: 3150,3870 3230,3965
  rectangle net GND: 3826.22,3160 3920,3290
  rectangle net GND: 4720,2775 4830,2830
  rectangle net B0: 4305,2605 4335,2665
  rectangle net GND: 4260.84,2580 4290,2600.41
  rectangle net GND: 4265,2620 4298.51,2645
  rectangle net GND: 4395,2565 4435,2590
  rectangle net GND: 4429.81,2645 4465,2685
  rectangle net GND: 4545,2555 4610,2585
  rectangle net GND: 3235,2405 3305,2455
  rectangle net GND: 3390,2400 3475,2455
  rectangle net GND: 3555,2400 3645,2455
  rectangle net GND: 3725,2405 3795,2460
  rectangle net GND: 3885,2405 3960,2455
  rectangle net GND: 4040,2400 4120,2460
  rectangle net GND: 4690,2765 4820,2870
  rectangle net GND: 3110,2504.59 3142.6,2595
  rectangle net GND: 4555,2465 4595,2560
  rectangle net GND: 4393.82,2474.59 4434.84,2543.81
  region net NetC5_1: 4160,3690 4160,3745 4280,3745
Bottom Layer:
  rectangle net GND: 3146.49,3845 3295,3969.88
  rectangle net GND: 3795,3212.5 3896.93,3315
  rectangle net GND: 3859.55,3150 3950,3290
  rectangle net GND: 4415,2650 4470,2715
  rectangle net GND: 4220,2500 4670,2630
  rectangle net GND: 3190,2345 4190,2540
  rectangle net VBAT: 2770,3865 3140,4020
  rectangle net 3V3: 4085,3000 4180,3120
  rectangle net 3V3: 3940,3960 4195,4050
  rectangle net GND: 5655,3690 5990,3790
  rectangle net GND: 3925,3415 4050,3500
  rectangle net GND: 3960,2980 4060,3140
  rectangle net GND: 5085,1975 5925,3270
  rectangle net GND: 2585,1915 3130,2665
  rectangle net GND: 3475,3775 3885,4190
  rectangle net GND: 4120,4110 4390,4320
  rectangle net GND: 4650,3805 4695,3965
  rectangle net GND: 4560,3895 4725,3970
  rectangle net GND: 4705,3630 4880,3845
  rectangle net GND: 5205,3770 5590,4060
  rectangle net GND: 4260,3240 4460,3425
  rectangle net GND: 3455,3340 3650,3490
  rectangle net GND: 5640,3745 5720,4075
  rectangle net GND: 4695,2725 4860,2840

## Silkscreen, mask and mechanical layers (free items; w line width, h text height)
Top Overlay:
  text "-" at 3315,3405 h60 r180
  text "+" at 3310,3140 h60 r180
  text "0" at 3305,2890 h60 r180
  text "高考倒计时" at 5155,2060 h150
  text "全椒中学" at 5465,1895 h150
  text "河海大学" at 4835,1885 h150